# Altium PCB Invertor.PcbDoc
Units mil, origin at the board's own origin, x right, y up, seen from the top; angles counter-clockwise.
Board outline 6000 x 4000 mil, 2 copper layers (Top Layer, Bottom Layer); 101 components, 103 nets, 208 pads, 0 vias.
Unrouted connection lines stored in the file: 92.
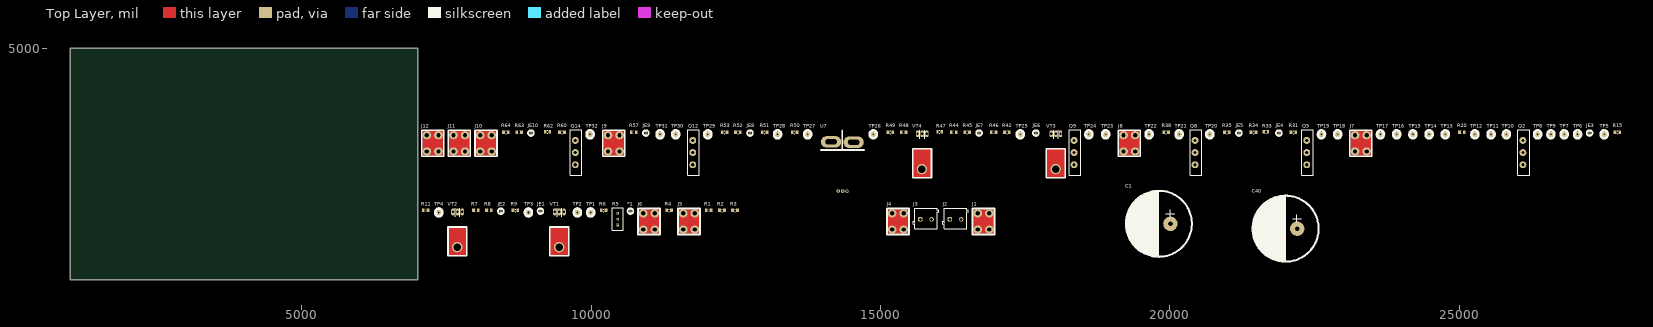
[diagram p0: Top Layer view]
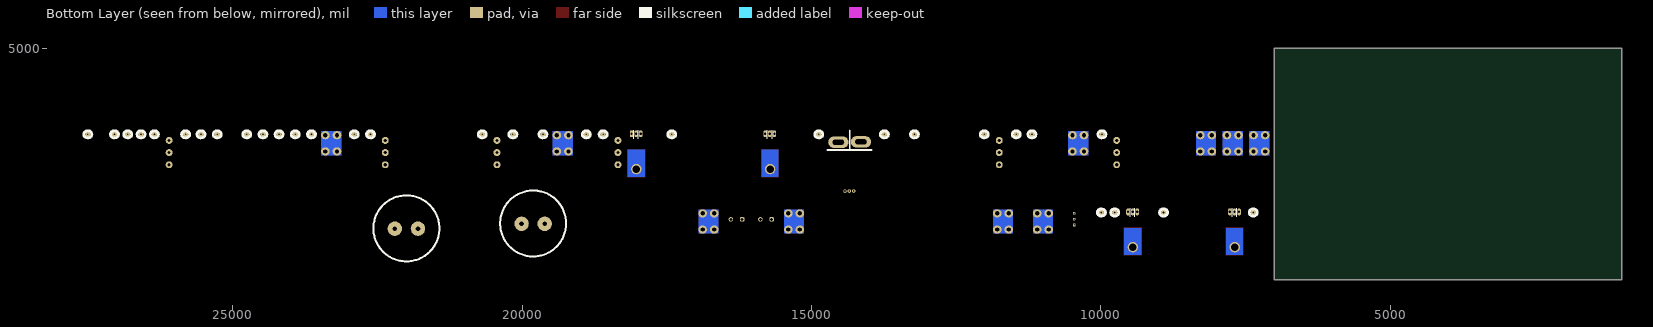
[diagram p1: Bottom Layer view, seen from below]

## Layer stack, top to bottom
Top Solder: solder mask 0.4, Solder Resist, Dk 3.5
Top Layer: signal copper 1.4
Dielectric 1: dielectric 12.6, FR-4, Dk 4.8
Bottom Layer: signal copper 1.4
Bottom Solder: solder mask 0.4, Solder Resist, Dk 3.5

## Board outline
1000,1000 7000,1000 7000,5000 1000,5000

## Design rules (kind name [scope] priority, off if disabled: settings)
Clearance [All] p1: gap=10 ignorepadtopadclearanceinfootprint=FALSE except(0: Arc-Hole Track-Hole SMDPad-Hole THPad-Hole Via-Hole Fill-Hole Poly-Hole Region-Hole Text-Hole)
PolygonConnect [All] p1: connectstyle=Relief reliefconductorwidth=10 reliefentries=4 polygonreliefangle="90 Angle" airgapwidth=10
RoomDefinition Invertor [InComponentClass('Invertor')] p1: confinementstyle=ConfineIn formatcopy=TRUE lockcomponents=FALSE outline 7045,1060 27830,1060 27830,3710 7045,3710
RoutingVias [All] p1: holewidth=28 width=50 viastyle="Through Hole" minholewidth=28 minwidth=50 maxholewidth=28 maxwidth=50
SolderMaskExpansion [All] p1: expansion=4 istentingtop=FALSE
Width [All] p1: maxlimit=10 minlimit=10 preferedwidth=10
30 further rules are at their usual default settings.

## Components (designator, comment, footprint, x,y, rotation, side; value= is the part's Value field where it differs from the comment)
*1 "JE" JE 10210,2190 r0 top
C1 "1500uF_100V" 1500uF_100V 19810,1970 r0 top value=100uF
C40 "1500uF_100V" 1500uF_100V 22000,1885 r0 top value=100uF
J1 "KLS8-M3" KLS8-M3 16780,2010 r0 top
J2 "691101710002" 691101710002 16295,2065 r0 top
J3 "691101710002" 691101710002 15785,2065 r0 top
J4 "KLS8-M3" KLS8-M3 15300,2010 r0 top
J5 "KLS8-M3" KLS8-M3 11690,2010 r0 top
J6 "KLS8-M3" KLS8-M3 11000,2010 r0 top
J7 "KLS8-M3" KLS8-M3 23300,3360 r0 top
J8 "KLS8-M3" KLS8-M3 19300,3360 r0 top
J9 "KLS8-M3" KLS8-M3 10390,3360 r0 top
J10 "KLS8-M3" KLS8-M3 8180,3360 r0 top
J11 "KLS8-M3" KLS8-M3 7720,3360 r0 top
J12 "KLS8-M3" KLS8-M3 7260,3360 r0 top
JE1 "Jumper" JE 8655,2190 r0 top
JE2 "Jumper" JE 7970,2190 r0 top
JE3 "Jumper" JE 26785,3540 r0 top
JE4 "Jumper" JE 21415,3540 r0 top
JE5 "Jumper" JE 20725,3540 r0 top
JE6 "Jumper" JE 17215,3540 r0 top
JE7 "Jumper" JE 16235,3540 r0 top
JE8 "Jumper" JE 12275,3540 r0 top
JE9 "Jumper" JE 10475,3540 r0 top
JE10 "Jumper" JE 8490,3540 r0 top
Q2 "IGW60T120" TO-264-3 26075,3200 r90 top
Q5 "IGW60T120" TO-264-3 22340,3200 r90 top
Q8 "IGW60T120" TO-264-3 20410,3200 r90 top
Q9 "IGW60T120" TO-264-3 18320,3200 r90 top
Q12 "IGW60T120" TO-264-3 11730,3200 r90 top
Q14 "IGW60T120" TO-264-3 9700,3200 r90 top
R1 "10k" Vishay_CRCW0805-e3_IPC_A 12030,2200 r0 top
R2 "1k" Vishay_CRCW0805-e3_IPC_A 12260,2200 r0 top
R3 "1k" Vishay_CRCW0805-e3_IPC_A 12485,2200 r0 top
R4 "1k" Vishay_CRCW0805-e3_IPC_A 11345,2200 r0 top
R5 "3296W-1-202LF" Bourns_3296W_MFG 10460,2050 r0 top
R6 "10K" Vishay_CRCW0805-e3_IPC_A 10215,2200 r0 top
R7 "22" Vishay_CRCW0805-e3_IPC_A 8005,2200 r0 top
R8 "22" Vishay_CRCW0805-e3_IPC_A 8230,2200 r0 top
R9 "22" Vishay_CRCW0805-e3_IPC_A 8690,2200 r0 top
R11 "10k" Vishay_CRCW0805-e3_IPC_A 7140,2200 r0 top
R15 "22" Vishay_CRCW0805-e3_IPC_A 27735,3550 r0 top
R20 "22" Vishay_CRCW0805-e3_IPC_A 25045,3550 r0 top
R31 "10" Vishay_CRCW0805-e3_IPC_A 22135,3550 r0 top
R33 "10" FP-CRCW0805-e3-IPC_B 21660,3560 r0 top
R34 "22" Vishay_CRCW0805-e3_IPC_A 21445,3550 r0 top
R35 "22" Vishay_CRCW0805-e3_IPC_A 20985,3550 r0 top
R38 "10k" Vishay_CRCW0805-e3_IPC_A 19935,3550 r0 top
R42 "10" Vishay_CRCW0805-e3_IPC_A 17185,3550 r0 top
R44 "22" Vishay_CRCW0805-e3_IPC_A 16265,3550 r0 top
R45 "22" Vishay_CRCW0805-e3_IPC_A 16495,3550 r0 top
R46 "22" Vishay_CRCW0805-e3_IPC_A 16955,3550 r0 top
R47 "10" FP-CRCW0805-e3-IPC_B 16020,3560 r0 top
R48 "10k" Vishay_CRCW0805-e3_IPC_A 15400,3550 r0 top
R49 "2M" Vishay_CRCW0805-e3_IPC_A 15170,3550 r0 top
R50 "10K" Vishay_CRCW0805-e3_IPC_A 13515,3550 r0 top
R51 "10k" Vishay_CRCW0805-e3_IPC_A 12995,3550 r0 top
R52 "2.2K" Vishay_CRCW0805-e3_IPC_A 12535,3550 r0 top
R53 "22" Vishay_CRCW0805-e3_IPC_A 12305,3550 r0 top
R57 "22" Vishay_CRCW0805-e3_IPC_A 10735,3550 r0 top
R60 "10" Vishay_CRCW0805-e3_IPC_A 9495,3550 r0 top
R62 "10" FP-CRCW0805-e3-IPC_B 9245,3560 r0 top
R63 "22" Vishay_CRCW0805-e3_IPC_A 8755,3550 r0 top
R64 "10k" Vishay_CRCW0805-e3_IPC_A 8525,3550 r0 top
TP1 "Test_Point_PCB" Test_Point 9990,2165 r0 top
TP2 "Test_Point_PCB" Test_Point 9760,2165 r0 top
TP3 "Test_Point_PCB" Test_Point 8915,2165 r0 top
TP4 "Test_Point_PCB" Test_Point 7365,2165 r0 top
TP5 "Test_Point_PCB" Test_Point 27505,3515 r0 top
TP6 "Test_Point_PCB" Test_Point 27045,3515 r0 top
TP7 "Test_Point_PCB" Test_Point 26815,3515 r0 top
TP8 "Test_Point_PCB" Test_Point 26355,3515 r0 top
TP9 "Test_Point_PCB" Test_Point 26585,3515 r0 top
TP10 "Test_Point_PCB" Test_Point 25815,3515 r0 top
TP11 "Test_Point_PCB" Test_Point 25550,3515 r0 top
TP12 "Test_Point_PCB" Test_Point 25270,3515 r0 top
TP13 "Test_Point_PCB" Test_Point 24760,3515 r0 top
TP14 "Test_Point_PCB" Test_Point 24480,3515 r0 top
TP15 "Test_Point_PCB" Test_Point 24200,3515 r0 top
TP16 "Test_Point_PCB" Test_Point 23920,3515 r0 top
TP17 "Test_Point_PCB" Test_Point 23640,3515 r0 top
TP18 "Test_Point_PCB" Test_Point 22900,3515 r0 top
TP19 "Test_Point_PCB" Test_Point 22620,3515 r0 top
TP20 "Test_Point_PCB" Test_Point 20690,3515 r0 top
TP21 "Test_Point_PCB" Test_Point 20160,3515 r0 top
TP22 "Test_Point_PCB" Test_Point 19640,3515 r0 top
TP23 "Test_Point_PCB" Test_Point 18890,3515 r0 top
TP24 "Test_Point_PCB" Test_Point 18600,3515 r0 top
TP25 "Test_Point_PCB" Test_Point 17415,3515 r0 top
TP26 "Test_Point_PCB" Test_Point 14875,3515 r0 top
TP27 "Test_Point_PCB" Test_Point 13740,3515 r0 top
TP28 "Test_Point_PCB" Test_Point 13220,3515 r0 top
TP29 "Test_Point_PCB" Test_Point 12015,3515 r0 top
TP30 "Test_Point_PCB" Test_Point 11460,3515 r0 top
TP31 "Test_Point_PCB" Test_Point 11190,3515 r0 top
TP32 "Test_Point_PCB" Test_Point 9980,3515 r0 top
U7 "ACS758" ACS758-100 14350,2920 r0 top
VT1 "BD139" TO-126(bend2) 9445,1560 r0 top
VT2 "BD140" TO-126(bend2) 7685,1560 r0 top
VT3 "BD139" TO-126(bend2) 18025,2910 r0 top
VT4 "BD140" TO-126(bend2) 15715,2910 r0 top

## Footprints (in the part's own frame and the unit in brackets; to place one, negate y for a bottom-side part, rotate by r counter-clockwise, add the part's x,y. Pads: shape width x height; smd on the part's side, far side on the other; paste and mask are expansions set on the pad)
1500uF_100V [mil]
  round 250 hole 80: 1(-200,0) 2(200,0)
  silkscreen extent -570,-570 570,570, body extent -594,-594 591,591, height 1264
691101710002 [mm] "5,00mm - modular - blue - Horizontal entry with pressure clamp - 12,6mm height - 02p"
  rrect50% 1.95x1.95 hole 1.3: 1(-2.5,-0.5)
  round 1.95 hole 1.3: 2(2.5,-0.5)
  silkscreen extent -5.6,-4.5 5.6,4.5, body extent -5.6,-4.5 5.6,4.5, height 12.65
ACS758-100 [mil]
  round 60 hole 30: 1(-80,-385) 2(-5,-385) 3(70,-385)
  oval 350x200 hole 90 slot 195 at 0 deg: 4(185,460) 5(-205,465)
  silkscreen extent -385,325 370,665, body extent -281,-404 271,492, height 280
Bourns_3296W_MFG [mm]
  rect 1.2x1.2 hole 0.7 paste-1000 mask+0: 1(0.005,-2.54)
  round 1.2 hole 0.7 paste-1000 mask+0: 2(0.005,0) 3(0.005,2.54)
  silkscreen extent -2.48,-4.89 2.48,4.89, body extent -2.58,-4.99 2.58,4.99, height 0.25
FP-CRCW0805-e3-IPC_B [mil]
  rect 39.63x55.44 smd paste+0 mask+0: 1(-37.44,0) 2(37.44,0)
  silkscreen extent -3,-25 3,25, body extent -67,-38 67,38, height 10
JE [mil]
  rect 50x40 smd: 1(468,28) 2(468,-30)
  silkscreen extent 418,-52 518,48
KLS8-M3 [mil]
  oval 150x140 hole 75: 1(-100,-140) 1(-100,140) 1(100,-140) 1(100,140)
  Top Layer region: -175,-210 175,-210 175,210 -175,210
  Bottom Layer region: -175,-210 175,-210 175,210 -175,210
  silkscreen extent -190,-225 190,225, body extent -157,-157 157,157, height 272
Test_Point [mil]
  round 90 hole 30 unplated paste+4 mask+4: 1(0,0)
  silkscreen extent -78,-78 78,78
TO-126(bend2) [mil]
  oval 60x120 hole 40: 1(85,615) 2(5,615) 3(-75,615)
  round 180 hole 130: 2(0,5)
  Top Layer region: -155,-140 160,-140 160,350 -155,350
  Bottom Layer region: -145,-130 150,-130 150,340 -145,340
  silkscreen extent -160,-145 165,680, body extent -155,-139 160,629, height 133
TO-264-3 [mil]
  round 120 hole 55: 1(-210,-25) 2(0,-25) 3(210,-25)
  silkscreen extent -395,-140 395,60, body extent -394,-138 394,59, height 1262
Vishay_CRCW0805-e3_IPC_A [mil]
  rect 47.5x59.38 smd paste+0 mask+0: 1(-41.37,0) 2(41.37,0)
  silkscreen extent -3,-25 3,25, body extent -85,-49 85,49, height 10

## Part data
C1 C40: library part CMP-05427-000015-1, "CAP ALUM 1500UF 20% 100V", Capacitance=100uF, Leakage Current=100uA, Manufacturer=Panasonic, Manufacturer Part Number=EEE-1HA101UP, Package=SF, Ripple Current=200mA, Temperature="-40°C to +85°C", Temperature Range High=+85°C, Temperature Range Low=-40°C, Tolerance=20%, Voltage=50V, Automotive=Yes, Automotive Grade="Grade 3", Category=Cap, ComponentLink2Description=Datasheet, ComponentLink2URL=https://industrial.panasonic.com/cdbs/www-data/pdf/RDE0000/ABA0000C1145.pdf, Device Class L1="Passive Components", Device Class L2=Capacitors, Device Class L3="Aluminum Electrolytic Capacitors", Digikey Description="CAP ALUM 100UF 20% 50V SMD", Dissipation Factor=0.12%, Height=10.5mm, Lead Free=Yes, Life=2000Hours, Material=Aluminum, Mouser Description="Cap Aluminum Lytic 100uF 50V 20% (8 X 10.2mm) SMD 200mA 2000h 85C Automotive T/R", Octopart=https://octopart.com/eee-1ha101up-panasonic-55396734, RoHS=TRUE, Voltage Rating=50V
J2 J3: "WR-TBL Series 101 Horizontal Entry Modular, THT, pitch 5mm, 2p", Manufacturer="Wurth Elektronik", Operating Temperature Max=105°C, Operating Temperature Min=-40°C, Rated Current=16A, Working Voltage=250V, Application="Pressure Clamp", Category="Terminal Blocks", ComponentLink1Description="Website Link", ComponentLink1URL=https://www.we-online.com/redexpert/article/691101710002?ad, ComponentLink2Description="Datasheet Link", ComponentLink2URL=https://www.we-online.com/redexpert/spec/691101710002?ad, Manufacturer Part Number=691101710002, Match Code=WR-TBL, Modularity=Yes, Mount="Through Hole", Number of Pins=2, Number of Rows=1, Orientation=Horizontal, Packaging=Box, Pitch=5mm
JE1 JE2 JE3 JE4 JE5 JE6 JE7 JE8 JE9 JE10: library part JE
Q2 Q5 Q8 Q9 Q12 Q14: library part F60N120, "Low Loss IGBT in TrenchStop and Fieldstop Technology, PG-TO247-3-44, Tube, Green", Manufacturer=Infineon, Switching Frequency="TRENCHSTOP 2-20kHz", ComponentLink1Description="Manufacturer URL", ComponentLink1URL=http://www.infineon.com/, ComponentLink2Description=Datasheet, ComponentLink2URL=http://www.infineon.com/dgdl/IGW60T120_Rev2_4G.pdf?folderId=db3a304412b407950112b408e8c90004&fileId=db3a304412b407950112b428250e3d74, ComponentLink3Description="Package Specification", ComponentLink3URL=http://www.infineon.com/dgdl/IDW10S120_Rev+2.pdf?folderId=db3a304314dca38901151224afae0c96&fileId=db3a304336724dc40136789691a04aa5, DatasheetVersion="Rev. 2.4", Green=TRUE, Halogen-free=FALSE, IC(max) @ 25 degC="100 A", Mounting Technology="Through Hole", PackageDescription="3-Pin Plastic (Green) Transistor Single Outline Package, Body 15.915 x 20.95 mm, Pitch 5.44 mm", PackageReference=PG-TO247-3-44_A, PackageVersion="Rev. 05, 07/2010", Packing=Tube, PartNumber=IGW60T120, RevisionNote="Lost Devices pt2", VCE (max)="1,200 V", VCE(sat) (typ)="2.3 V"
R1 R2 R3 R4 R6 R7 R8 R9 R11 R15 R20 R31 R33 R34 R35 R38 R42 R44 R45 R46 R47 R48 R51 R53 R57 R60 R62 R63 R64: library part CRCW08050000Z0EA
R49: library part CRCW08050000Z0EA, "22M"
R50 R52: library part RC0805FR-07100KL
TP1 TP2 TP3 TP4 TP5 TP6 TP7 TP8 TP9 TP10 TP11 TP12 TP13 TP14 TP15 TP16 TP17 TP18 TP19 TP20 TP21 TP22 TP23 TP24 TP25 TP26 TP27 TP28 TP29 TP30 TP31 TP32: library part TP_PCB?, "Test_Point"

## Nets (pads, with @x,y where several pads share a name; then routed paths per layer and width w, separated by ;. In a path a pad name is that pad's centre, name@x,y a point inside that pad or via, vN(x,y) a via of type N, cw(c..) or ccw(c..) an arc to the next point about the centre after c; other vN are vias at no path point)
+3V3: *1.1 R6.2
+5V: J2.1 U7.1
+12: 
+48: C1.2 C40.2 R1.2
GND: J2.2 J3.1 J10.1 J11.1 J12.1 Q5.3 Q9.3 Q14.3 R5.2 R5.3 R11.1 R38.1 R48.1 R51.2 R52.1 R64.1 U7.2 VT2.2 VT4.2
Net*1_2: *1.2
NetC1_1: C1.1 C40.1 J5.1 J6.1
NetC12_1: JE2.2 R8.1
NetC12_2: R8.2 VT1.1 VT2.1
NetC13_1: 
NetC13_2: TP17.1
NetC14_1: R15.2
NetC14_2: JE6.1 JE8.2 JE9.1 JE10.1 TP11.1
NetC15_2: TP7.1
NetC16_1: TP5.1
NetC16_2: Q2.3 Q5.2
NetC18_2: U7.4
NetC21_1: TP18.1
NetC22_1: TP16.1
NetC23_1: TP12.1
NetC24_1: TP20.1
NetC24_2: Q8.3 Q9.2
NetC28_1: JE7.2 R45.1
NetC28_2: R45.2 VT3.1 VT4.1
NetC32_2: R50.1 R52.2 TP28.1
NetC33_1: TP29.1
NetC33_2: Q12.3 Q14.2
NetC37_2: 
NetD1_2: 
NetD3_2: R1.1
NetD4_1: R2.1
NetD6_2: 
NetD9_1: JE2.1 R9.2 R20.2 R34.2 R35.2 R38.2
NetD9_2: R9.1 TP2.1
NetD10_2: R20.1
NetD11_2: 
NetD15_1: TP10.1
NetD15_2: Q2.1
NetD16_2: 
NetD18_1: R31.1 R33.2 TP19.1
NetD18_2: Q5.1 R33.1
NetD19_2: R34.1
NetD21_2: R35.1
NetD24_1: TP21.1
NetD24_2: Q8.1
NetD25_1: R42.1 R47.2 TP24.1
NetD25_2: Q9.1 R47.1
NetD27_1: JE7.1 R46.2 R53.2 R57.2 R63.2 R64.2 TP23.1
NetD27_2: R46.1 TP26.1
NetD28_2: R53.1
NetD31_1: TP30.1
NetD31_2: Q12.1
NetD32_2: R57.1
NetD33_1: R60.1 R62.2 TP32.1
NetD33_2: Q14.1 R62.1
NetD35_2: R63.1
NetD36_2: 
NetD38_2: 
NetJ1_1: J1.1 J4.1
NetJ7_1: J7.1
NetJ8_1: J8.1
NetJ9_1: J9.1
NetJE1_1: JE1.1 JE3.1 JE4.1 JE5.1 R15.1 TP1.1
NetJE1_2: JE1.2
NetJE3_2: JE3.2
NetJE4_2: JE4.2
NetJE5_2: JE5.2
NetJE6_2: JE6.2
NetJE8_1: JE8.1
NetJE9_2: JE9.2
NetJE10_2: JE10.2
NetL4_1: U7.5
NetQ1_3: 
NetQ3_1: R4.1
NetR3_1: R3.1 R5.1
NetR4_2: R4.2
NetR6_1: R6.1
NetR7_1: R7.1 R11.2 TP3.1 VT1.3 VT2.3
NetR7_2: R7.2
NetR10_1: TP4.1
NetR13_2: TP8.1
NetR14_2: TP9.1
NetR17_1: 
NetR19_1: 
NetR23_1: TP14.1
NetR29_2: TP15.1
NetR30_2: 
NetR31_2: R31.2
NetR37_1: 
NetR40_2: TP22.1
NetR41_2: 
NetR42_2: R42.2
NetR44_1: R44.1 R48.2 TP25.1 VT3.3 VT4.3
NetR44_2: R44.2 TP13.1
NetR49_1: R49.1 R51.1
NetR50_2: R50.2 TP27.1 U7.3
NetR55_1: 
NetR58_2: TP31.1
NetR59_2: 
NetR60_2: R60.2
VCC: TP6.1 VT1.2 VT3.2
"VCC +320": Q2.2 Q8.2 Q12.2 R49.2
VCC+12V: J3.2 R2.2 R3.2